# Altium PCB SourceFollower_TSFP-4-1_Simple.PcbDoc
Units mm, origin at the board's own origin, x right, y up, seen from the top; angles counter-clockwise.
Board outline 40 x 8 mm, 2 copper layers (Top Layer, Bottom Layer); 14 components, 8 nets, 35 pads, 4 vias.
Unrouted connection lines stored in the file: 14.
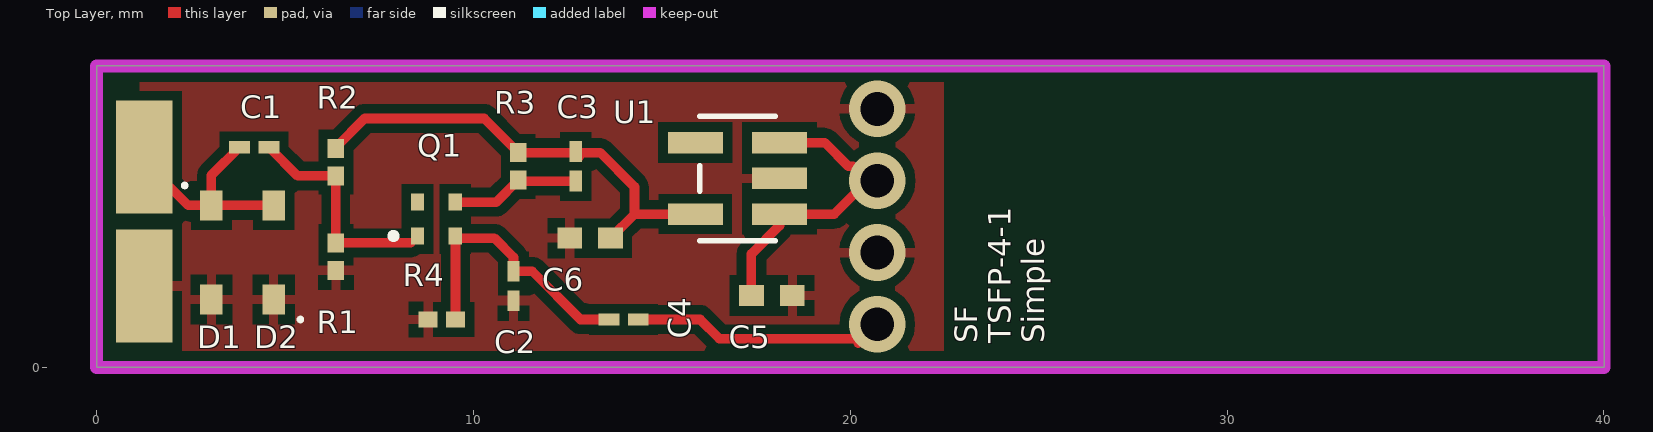
[diagram p0: Top Layer view]
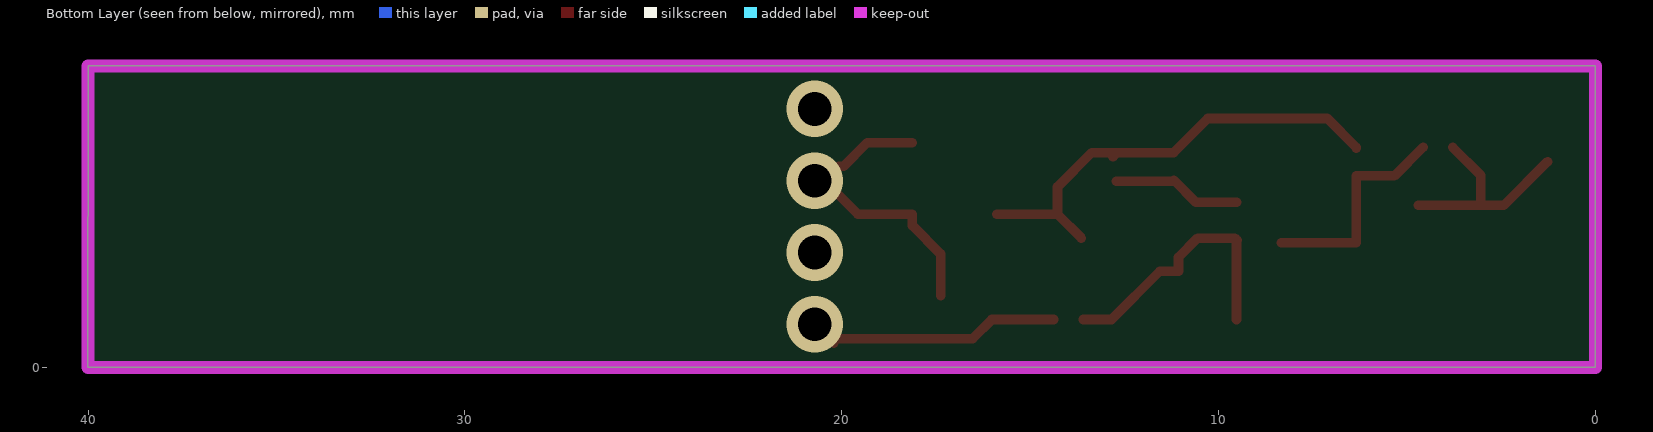
[diagram p1: Bottom Layer view, seen from below]

## Layer stack, top to bottom
Top Solder: solder mask 0.0102, Solder Resist, Dk 3.5
Top Layer: signal copper 0.0356
Dielectric 1: dielectric 0.32, FR-4, Dk 4.8
Bottom Layer: signal copper 0.0356
Bottom Solder: solder mask 0.0102, Solder Resist, Dk 3.5

## Board outline
0,0 40.005,0 40,8 0,8

## Design rules (kind name [scope] priority, off if disabled: settings)
Clearance [All] p1: gap=0.254 ignorepadtopadclearanceinfootprint=FALSE except(0: Arc-Hole Track-Hole SMDPad-Hole THPad-Hole Via-Hole Fill-Hole Poly-Hole Region-Hole Text-Hole)
PolygonConnect [All] p1: connectstyle=Relief reliefconductorwidth=0.254 reliefentries=4 polygonreliefangle="90 Angle" airgapwidth=0.254
RoomDefinition SourceFollower_TSFP-4-1_Simple [InComponentClass('SourceFollower_TSFP-4-1_Simple')] p1: confinementstyle=ConfineIn formatcopy=TRUE lockcomponents=FALSE outline 0,0 40,0 40,8 0,8
RoutingVias [All] p1: holewidth=0.711 width=1.27 viastyle="Through Hole" minholewidth=0.711 minwidth=1.27 maxholewidth=0.711 maxwidth=1.27
SolderMaskExpansion [All] p1: expansion=0.102
Width [All] p1: maxlimit=0.254 minlimit=0.254 preferedwidth=0.254
30 further rules are at their usual default settings.

## Components (designator, comment, footprint, x,y, rotation, side; value= is the part's Value field where it differs from the comment)
C1 "Part Number: C0201C270J3GACTU" C0201 4.181,5.842 r0 top value=Value
C2 "Part Number: C0201C270J3GACTU" C0201 11.064,2.159 r90 top value=Value
C3 "Part Number: C0201C270J3GACTU" C0201 12.715,5.334 r90 top value=Value
C4 "Part Number: C0201C270J3GACTU" C0201 13.985,1.27 r180 top value=Value
C5 "Part Number: CC0402KRX7R6BB104" YAG_CC0402 17.922,1.905 r180 top value=Value
C6 "Part Number: CC0402KRX7R6BB104" YAG_CC0402 13.096,3.429 r0 top value=Value
D1 "BAT15-03W" INF-SOD323_V 3.048,3.048 r0 top
D2 "BAT15-03W" INF-SOD323_V 4.699,3.048 r180 top
Q1 "BFP720F" INF-TSFP-4-1_V 9.017,3.937 r90 top
R1 "Part Number: RC0201FR-0718KL" RES_RC0201_P6XP3 6.35,2.936 r90 top value=Value
R2 "Part Number: RC0201FR-0718KL" RES_RC0201_P6XP3 6.35,5.446 r90 top value=Value
R3 "Part Number: RC0201FR-0718KL" RES_RC0201_P6XP3 11.191,5.334 r90 top value=Value
R4 "Part Number: RC0201FR-0718KL" RES_RC0201_P6XP3 9.159,1.27 r0 top value=Value
U1 "Part Number: LP5907MFX-3.3/NOPB" DBV5 17.008,5.014 r180 top value=Value

## Footprints (in the part's own frame and the unit in brackets; to place one, negate y for a bottom-side part, rotate by r counter-clockwise, add the part's x,y. Pads: shape width x height; smd on the part's side, far side on the other; paste and mask are expansions set on the pad)
C0201 [mil]
  rect 21.78x13 smd paste+0 mask+0: 1(-15.39,0) 2(15.39,0)
  body extent 0,0 10,10, height 10
DBV5 [mil]
  rect 57.56x22.36 smd paste+0 mask+0: 1(-44,37.4) 2(-44,0) 3(-44,-37.4) 4(44,-37.4) 5(44,37.4)
  silkscreen extent -40,-65 40,65, body extent 0,0 10,10, height 10
INF-SOD323_V [mm] "SOD, 2-Leads, Body 1.7x1.25 mm"
  rect 0.6x0.8 smd: 1(0,1.25) 2(0,-1.25)
  silkscreen extent -0.76,1.73 -0.66,1.83, body extent -0.63,-0.85 0.63,0.85, height 1.1
INF-TSFP-4-1_V [mm] "SOP-Flat, Body 0.8x1.4 mm, Pitch 1 mm"
  rect 0.45x0.35 smd: 1(-0.45,0.5) 2(-0.45,-0.5) 3(0.45,-0.5) 4(0.45,0.5)
  silkscreen extent -0.49,1.1 -0.41,1.17, body extent -0.4,-0.7 0.4,0.7, height 0.59
RES_RC0201_P6XP3 [mm]
  rect 0.503x0.43 smd paste+0 mask+0: 1(-0.366,0) 2(0.366,0)
  body extent 0,0 0.25,0.25, height 0.25
YAG_CC0402 [mil]
  rect 25.78x22 smd paste+0 mask+0: 1(-21.39,0) 2(21.39,0)
  body extent 0,0 10,10, height 10

## Part data
C1 C2 C3 C4: library part C0201C270J3GACTU, "No Description Available", Built_By=EMA_UL_Team, Copyright="Copyright (C) 2018 Accelerated Designs. All rights reserved", Manufacturer_Part_Number=C0201C270J3GACTU, RefDes=RefDes, Type=DEV, Vendor=Kemet
C5 C6: library part CC0402KRX7R6BB10, "No Description Available", Manufacturer_Part_Number=CC0402KRX7R6BB104, Built_By=EMA_UL_Team, Copyright="Copyright (C) 2018 Accelerated Designs. All rights reserved", RefDes=RefDes, Type=DEV, Vendor=Yageo
D1 D2: "Single Silicon Schottky Diode, 110 mA IF Max, SOD32, Green", Manufacturer=Infineon, Supplier Part Number 1=N/A, ComponentLink1Description="Manufacturer URL", ComponentLink1URL=http://www.infineon.com/, ComponentLink2Description=Datasheet, ComponentLink2URL=http://www.infineon.com/dgdl/bat15series.pdf?folderId=db3a304314dca3890114ff6812070b44&fileId=db3a304314dca3890114ff6b74ca0b48&location=en.Products.RF.RF_Mixer___Detector_Schottky_Diodes.DATASHEET.bat15series.pdf, ComponentLink3Description="Package Specification", ComponentLink3URL=http://www.infineon.com/dgdl/SOD323-Package_Overview.pdf?folderId=db3a30431936bc4b011952aab84f3bbe&fileId=db3a30431936bc4b011952beed653be3, Configuration=Single, CT (typ)="0.26 pF", DatasheetVersion=Jun-2011, Green=yes, Group="RF Mixer", IF (max)="110 mA", Mounting Technology="Surface Mount", PackageDescription="2-Pin Small Outline Diode Package, 1.25 x 1.7 mm Body", PackageReference=SOD323, PartNumber=BAT15-03W, Supplier 1=Mouser, VF (typ)="0.23 V", VR (max)="4 V"
Q1: "SiGe:C Heterojunction Wideband RF Bipolar Transistor, 4 V VCEO, 20 mA IC, 26 dB Gmax, TSFP-4-1, Green", Manufacturer=Infineon, ComponentLink1Description="Manufacturer URL", ComponentLink1URL=http://www.infineon.com/, ComponentLink2Description=Datasheet, ComponentLink2URL=http://www.infineon.com/dgdl/bfp720f.pdf?folderId=db3a30431400ef68011425b291f205c5&fileId=db3a30431ddc9372011e2673bdbf4727&location=en.Products.RF.RF_Transistors_.Ultra_Low_Noise_SiGe_C_Transistors_for_use_up_to_12_GHz.DATASHEET.bfp720f.pdf, ComponentLink3Description="Package Specification", ComponentLink3URL=http://www.infineon.com/dgdl/TSFP-4-1%2C-2-Package_Overview.pdf?folderId=db3a30431936bc4b011953b7d203683d&fileId=db3a30431936bc4b011953c249663734, DatasheetVersion="Rev. 1.0", Gmax (typ)="26 dB", Green=yes, Group="Ultra low noise SiGe", Halogen-free=yes, IC (max)="20 mA", Mounting Technology="Surface Mount", NFmin (typ)="0.5 dB", PackageDescription="4-Pin Thin Small Flat Package, 0.8 x 1.4 mm Body, 0.5 mm Pitch", PackageReference=TSFP-4-1, PartNumber=BFP720F, Ptot (max)=80mW, VCEO (max)="4 V"
R1 R2 R3 R4: library part RC0201FR-0718KL, "No Description Available", Built_By=EMA_Anthony, Copyright="Copyright (C) 2018 Accelerated Designs. All rights reserved", Manufacturer_Part_Number=RC0201FR-0718KL, RefDes=RefDes, Type=DEV, Vendor=Yageo
U1: library part LP5907MFX-3.3/NO, "No Description Available", Manufacturer_Part_Number=LP5907MFX-3.3/NOPB, Built_By=EMA_UL_Team, Copyright="Copyright (C) 2018 Accelerated Designs. All rights reserved", RefDes=RefDes, Type=DEV, Vendor="Texas Instruments"

## Free pads (board coordinates)
  rect 1.5x3 smd: 5(1.27,2.159) 5(1.27,5.588)

## Via types
v1: diameter 1.5, hole 0.9, Top Layer to Bottom Layer, 4 vias

## Nets (pads, with @x,y where several pads share a name; then routed paths per layer and width w, separated by ;. In a path a pad name is that pad's centre, name@x,y a point inside that pad or via, vN(x,y) a via of type N, cw(c..) or ccw(c..) an arc to the next point about the centre after c; other vN are vias at no path point)
GND: C2.1 C5.1 C6.1 D1.2 D2.1 pad.5@1.27,2.159 R1.1 R4.1 U1.2
  other v1: 20.716,3.048 20.716,6.858
NetC1_2: C1.2 Q1.1 R1.2 R2.1 | length 5
  Top Layer w0.254: C1.2 5.334,5.08 R2.1 R1.2 7.493,3.302
NetC2_2: C2.2 C4.2 Q1.2 R4.2 | length 7.3
  Top Layer w0.254: Q1.2@9.508,3.368 9.569,3.429 10.556,3.429 11.064,2.921 C2.2 11.562,2.55 12.842,1.27 C4.2 ; R4.2 Q1.2@9.525,3.351
NetC3_1: C3.1 Q1.3 R3.1 | length 1.5
  Top Layer w0.254: R3.1@11.216,4.943 C3.1
"RF In": C1.1 D1.1 D2.2 pad.5@1.27,5.588
"RF Out": C4.1
  other v1: 20.716,1.143
VCC: C5.2 U1.1 U1.3
  other v1: 20.716,4.953
VOUT: C3.2 C6.2 R2.2 R3.2 U1.5
pads on no net: Q1.4 U1.4
copper on no net: | length 35
  Top Layer w0.254: 1.27,5.461 2.433,4.298 3.048,4.298 ; 3.79,5.842 3.048,5.1 3.048,4.298 ; 4.699,4.298 3.048,4.298 ; 6.35,5.812 6.35,5.842 7.112,6.604 10.287,6.604 11.191,5.7 12.69,5.7 ; 7.493,3.302 8.332,3.302 ; 9.517,4.387 10.61,4.387 11.191,4.968 ; 12.802,5.588 12.69,5.7 ; 13.639,3.429 14.274,4.064 ; 14.376,1.27 16.017,1.27 16.525,0.762 20.208,0.762 ; 15.89,4.064 14.274,4.064 ; 17.379,1.905 17.379,3.013 18.125,3.759 18.125,4.064 19.573,4.064 20.208,4.699 ; 18.125,5.964 18.679,5.964 ; 18.402,5.964 19.324,5.964 19.954,5.334 20.081,5.334 ; 20.208,0.635 20.716,1.143 ; 12.69,5.7 13.365,5.7 14.274,4.791 14.274,4.064

## Polygon pours and split planes (outlines as drawn)
GND on Top Layer "Top Layer-GND" (solid, pour order 4): 1.143,0 1.143,8.001 22.479,8.001 22.479,0

## Keep-outs
Keep-Out Layer:
  the board outline again, w0.35

## Silkscreen, mask and mechanical layers (free items; w line width, h text height)
Top Overlay:
  text "SF" at 23.368,0.635 h0.6 r90
  text "TSFP-4-1" at 24.257,0.635 h0.6 r90
  text "Simple" at 25.146,0.635 h0.6 r90